# Altium PCB fader2_pcb.PcbDoc (part 3 of 3)
Units mil, origin at the board's own origin, x right, y up, seen from the top; angles counter-clockwise.
Board outline 5700 x 3900 mil, 6 copper layers (TOP, GND1, PWR1, PWR2, GND4, BOT), stack 48.468 mil thick; 196 components, 127 nets, 1359 pads, 531 vias.
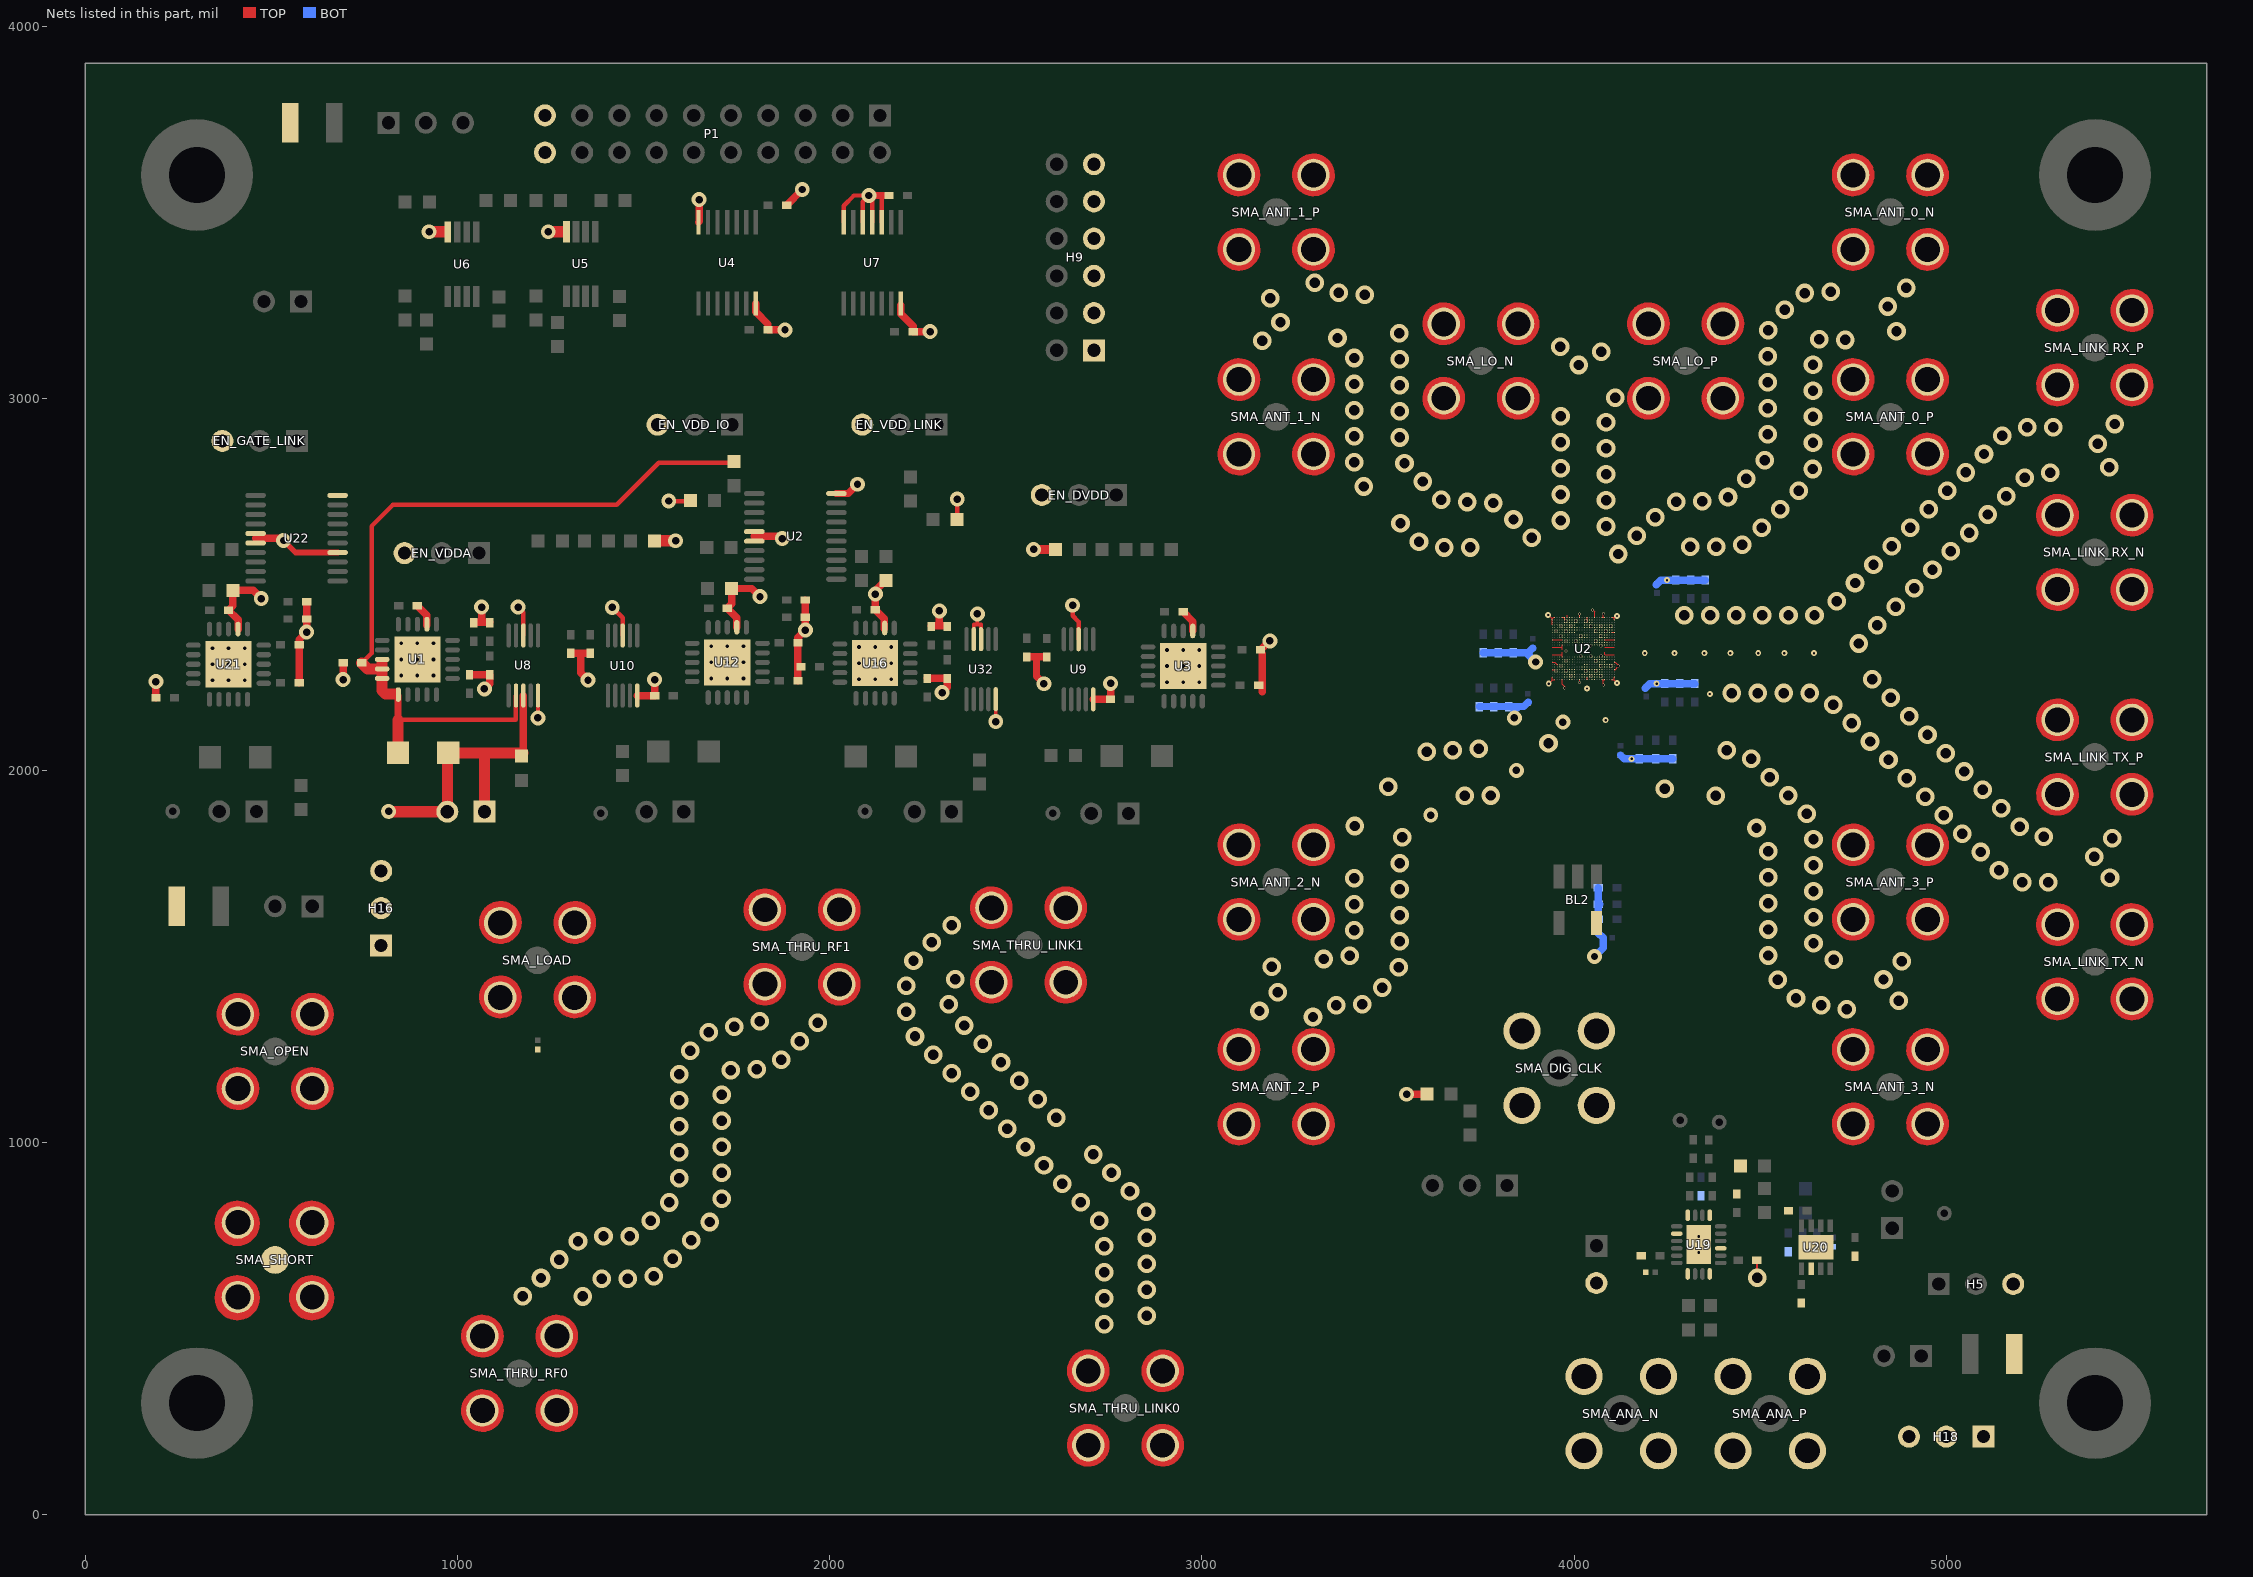
[diagram p7: the nets of this part, all layers, seen from the top]

## Via types
v1: diameter 50, hole 28, TOP to BOT, 259 vias
v2: diameter 40, hole 20, TOP to BOT, tented both sides, 128 vias
v3: diameter 8, hole 6, TOP to BOT, tented both sides, 63 vias
v4: diameter 20, hole 10, TOP to BOT, 45 vias
v5: diameter 16, hole 6, TOP to BOT, tented both sides, 17 vias
v6: diameter 8, hole 6, TOP to BOT, 7 vias
v7: diameter 40, hole 20, TOP to BOT, 4 vias
v8: diameter 20, hole 10, TOP to BOT, tented both sides, 4 vias
v9: diameter 19.68, hole 7.87, TOP to BOT, 2 vias
v10: diameter 12, hole 6, TOP to BOT, tented both sides, 2 vias

## Nets (pads, with @x,y where several pads share a name; then routed paths per layer and width w, separated by ;. In a path a pad name is that pad's centre, name@x,y a point inside that pad or via, vN(x,y) a via of type N, cw(c..) or ccw(c..) an arc to the next point about the centre after c; other vN are vias at no path point) (continued)
VDDA_REG: C2.1 R9.2 R38.1 U1.1 U1.18 U1.19 U1.20 U8.2 | length 2127.6
  TOP w12: C2.1@742.82,2288.83 769.13,2315.14 769.13,2656.35 826.61,2713.83 1427.82,2713.83 1540.82,2826.83 R9.2@1739.82,2826.83 ; 841.25,2136.18 1157.25,2136.18 U8.2@1157.25,2201.24
  TOP w20: 840.31,2135.24 U1.1@840.31,2201.26
  TOP w30: C2.1@742.82,2288.83 759,2272.65 U1.19@797,2272.65 ; 797,2287.24 U1.19@797,2272.65 ; 832.31,2205.24 806.28,2205.24 797,2214.52 U1.19@797,2272.65 ; R38.1@840.31,2047.24 840.31,2135.24
VDDA_RS: FB10.1 H_VDDA.1 H_VDDA.2 R38.2 TP_VDDA.1 U8.3 | length 829.6
  TOP w20: R38.2@972.82,2044.75 R38.2@975.31,2047.24 ; FB10.1@1176.94,2047.65 U8.3@1176.94,2201.24
  TOP w30: TP_VDDA.1@814.92,1889.92 815.69,1889.14 H_VDDA.2@972.82,1889.14 R38.2@972.82,2044.75 ; R38.2@975.53,2047.02 1072.82,2047.02 ; H_VDDA.1@1072.82,1889.14 1072.82,2047.02 ; FB10.1@1176.31,2047.02 1072.82,2047.02
VSS: BL2.4 C1.2 C2.2 C3.2 C4.2 C5.2 C6.2 C8.2 C10.2 C13.2 C14.2 C17.2 C18.2 C19.2 C20.2 C21.2 C22.2 C23.2 C25.2 C26.2 C29.2 C30.2 C31.2 C32.2 C33.2 C34.2 C35.2 C36.2 C37.2 C38.2 C39.2 C40.2 C43.2 C46.2 C47.2 C48.2 C49.2 C50.2 C51.2 C52.2 C53.2 C62.2 C63.2 C64.2 C65.2 C66.2 C67.2 C69.2 C70.2 C71.2 C75.2 C76.2 C77.2 C78.2 C86.2 C87.2 C88.2 C89.2 C90.2 C91.2 C92.2 C95.2 C96.2 C98.2 C99.2 C100.2 C102.2 C103.2 C104.2 C105.2 C113.2 C114.2 C115.2 C116.2 C117.2 C118.2 EN_DVDD.3 EN_GATE_LINK.3 EN_VDD_IO.3 EN_VDD_LINK.3 EN_VDDA.3 H5.3 H9.1 H9.3 H9.5 H9.7 H9.9 H9.11 H13.2 H16.1 H16.2 H16.3 H18.1 H18.2 H18.3 P1.19 P1.20 R1.1 R2.2 R5.1 R6.1 R23.2 R33.2 R40.1 R44.2 R51.2 R72.1 SMA_ANA_N.2 SMA_ANA_N.3 SMA_ANA_N.4 SMA_ANA_N.5 SMA_ANA_P.2 SMA_ANA_P.3 SMA_ANA_P.4 SMA_ANA_P.5 SMA_ANT_0_N.2 SMA_ANT_0_N.3 SMA_ANT_0_N.4 SMA_ANT_0_N.5 SMA_ANT_0_P.2 SMA_ANT_0_P.3 SMA_ANT_0_P.4 SMA_ANT_0_P.5 SMA_ANT_1_N.2 SMA_ANT_1_N.3 SMA_ANT_1_N.4 SMA_ANT_1_N.5 SMA_ANT_1_P.2 SMA_ANT_1_P.3 SMA_ANT_1_P.4 SMA_ANT_1_P.5 SMA_ANT_2_N.2 SMA_ANT_2_N.3 SMA_ANT_2_N.4 SMA_ANT_2_N.5 SMA_ANT_2_P.2 SMA_ANT_2_P.3 SMA_ANT_2_P.4 SMA_ANT_2_P.5 SMA_ANT_3_N.2 SMA_ANT_3_N.3 SMA_ANT_3_N.4 SMA_ANT_3_N.5 SMA_ANT_3_P.2 SMA_ANT_3_P.3 SMA_ANT_3_P.4 SMA_ANT_3_P.5 SMA_DIG_CLK.2 SMA_DIG_CLK.3 SMA_DIG_CLK.4 SMA_DIG_CLK.5 SMA_LINK_RX_N.2 SMA_LINK_RX_N.3 SMA_LINK_RX_N.4 SMA_LINK_RX_N.5 SMA_LINK_RX_P.2 SMA_LINK_RX_P.3 SMA_LINK_RX_P.4 SMA_LINK_RX_P.5 SMA_LINK_TX_N.2 SMA_LINK_TX_N.3 SMA_LINK_TX_N.4 SMA_LINK_TX_N.5 SMA_LINK_TX_P.2 SMA_LINK_TX_P.3 SMA_LINK_TX_P.4 SMA_LINK_TX_P.5 SMA_LO_N.2 SMA_LO_N.3 SMA_LO_N.4 SMA_LO_N.5 SMA_LO_P.2 SMA_LO_P.3 SMA_LO_P.4 SMA_LO_P.5 SMA_LOAD.2 SMA_LOAD.3 SMA_LOAD.4 SMA_LOAD.5 SMA_OPEN.2 SMA_OPEN.3 SMA_OPEN.4 SMA_OPEN.5 SMA_SHORT.1 SMA_SHORT.2 SMA_SHORT.3 SMA_SHORT.4 SMA_SHORT.5 SMA_THRU_LINK0.2 SMA_THRU_LINK0.3 SMA_THRU_LINK0.4 SMA_THRU_LINK0.5 SMA_THRU_LINK1.2 SMA_THRU_LINK1.3 SMA_THRU_LINK1.4 SMA_THRU_LINK1.5 SMA_THRU_RF0.2 SMA_THRU_RF0.3 SMA_THRU_RF0.4 SMA_THRU_RF0.5 SMA_THRU_RF1.2 SMA_THRU_RF1.3 SMA_THRU_RF1.4 SMA_THRU_RF1.5 U1.12 U1.21 U2.10 U2.15 U2.16 U2.A2 U2.A7 U2.A10 U2.A13 U2.A16 U2.A19 U2.A22 U2.A25 U2.AA1 U2.AA2 U2.AA3 U2.AA4 U2.AA5 U2.AA6 U2.AA7 U2.AA8 U2.AA9 U2.AA10 U2.AA11 U2.AA14 U2.AA15 U2.AA18 U2.AA19 U2.AA20 U2.AA21 U2.AA22 U2.AA23 U2.AA24 U2.AA25 U2.AB1 U2.AB4 U2.AB5 U2.AB6 U2.AB7 U2.AB8 U2.AB9 U2.AB10 U2.AB11 U2.AB12 U2.AB13 U2.AB14 U2.AB15 U2.AB16 U2.AB17 U2.AB18 U2.AB19 U2.AB20 U2.AB21 U2.AB22 U2.AB23 U2.AB26 U2.AC4 U2.AC5 U2.AC6 U2.AC7 U2.AC8 U2.AC9 U2.AC11 U2.AC12 U2.AC14 U2.AC15 U2.AC17 U2.AC18 U2.AC20 U2.AC21 U2.AC22 U2.AC23 U2.AD4 U2.AD5 U2.AD6 U2.AD7 U2.AD20 U2.AD21 U2.AD22 U2.AD23 U2.AE1 U2.AE4 U2.AE5 U2.AE6 U2.AE7 U2.AE20 U2.AE21 U2.AE22 U2.AE23 U2.AE26 U2.AF2 U2.AF3 U2.AF4 U2.AF5 U2.AF6 U2.AF7 U2.AF10 U2.AF13 U2.AF16 U2.AF19 U2.AF22 U2.AF25 U2.B1 U2.B4 U2.B5 U2.B6 U2.B7 U2.B20 U2.B21 U2.B26 U2.C4 U2.C5 U2.C6 U2.C7 U2.C20 U2.C21 U2.D4 U2.D5 U2.D6 U2.D7 U2.D8 U2.D9 U2.D11 U2.D12 U2.D14 U2.D15 U2.D17 U2.D18 U2.D20 U2.D21 U2.E1 U2.E4 U2.E5 U2.E6 U2.E7 U2.E8 U2.E9 U2.E10 U2.E11 U2.E12 U2.E13 U2.E14 U2.E15 U2.E16 U2.E17 U2.E18 U2.E19 U2.E20 U2.E21 U2.E26 U2.F1 U2.F4 U2.F5 U2.F6 U2.F7 U2.F8 U2.F9 U2.F10 U2.F11 U2.F12 U2.F13 U2.F16 U2.F17 U2.F18 U2.F19 U2.F20 U2.F21 U2.F22 U2.F23 U2.F24 U2.F25 U2.F26 U2.G4 U2.G5 U2.G6 U2.G7 U2.G8 U2.G9 U2.G10 U2.G11 U2.G12 U2.G13 U2.G16 U2.G17 U2.G18 U2.G19 U2.G20 U2.G21 U2.G22 U2.G23 U2.G24 U2.G25 U2.H4 U2.H5 U2.H6 U2.H7 U2.H10 U2.H11 U2.H12 U2.H13 U2.H16 U2.H17 U2.H18 U2.H19 U2.H22 U2.H23 U2.H24 U2.H25 U2.J1 U2.J4 U2.J5 U2.J6 U2.J7 U2.J10 U2.J11 U2.J12 U2.J13 U2.J16 U2.J17 U2.J18 U2.J19 U2.J22 U2.J23 U2.J24 U2.J25 U2.J26 U2.K2 U2.K3 U2.K4 U2.K5 U2.K12 U2.K13 U2.K16 U2.K17 U2.K22 U2.K23 U2.K24 U2.K25 U2.K26 U2.L2 U2.L3 U2.L4 U2.L5 U2.L12 U2.L13 U2.L16 U2.L17 U2.L22 U2.L23 U2.L24 U2.L25 U2.M1 U2.M2 U2.M3 U2.M4 U2.M5 U2.M8 U2.M9 U2.M12 U2.M13 U2.M16 U2.M17 U2.M20 U2.M21 U2.M22 U2.M23 U2.M24 U2.M25 U2.M26 U2.N2 U2.N3 U2.N4 U2.N5 U2.N8 U2.N9 U2.N12 U2.N13 U2.N16 U2.N17 U2.N20 U2.N21 U2.N22 U2.N23 U2.N24 U2.N25 U2.P8 U2.P9 U2.P10 U2.P11 U2.P16 U2.P17 U2.P21 U2.P22 U2.P24 U2.P25 U2.R1 U2.R8 U2.R9 U2.R10 U2.R11 U2.R16 U2.R17 U2.R26 U2.T2 U2.T3 U2.T5 U2.T6 U2.T10 U2.T11 U2.T16 U2.T17 U2.U2 U2.U3 U2.U4 U2.U5 U2.U6 U2.U7 U2.U10 U2.U11 U2.U16 U2.U17 U2.U22 U2.U23 U2.U24 U2.U25 U2.V1 U2.V2 U2.V3 U2.V4 U2.V5 U2.V6 U2.V7 U2.V10 U2.V11 U2.V14 U2.V15 U2.V18 U2.V19 U2.V22 U2.V23 U2.V24 U2.V25 U2.V26 U2.W1 U2.W2 U2.W3 U2.W4 U2.W5 U2.W6 U2.W7 U2.W10 U2.W11 U2.W14 U2.W15 U2.W18 U2.W19 U2.W22 U2.W23 U2.W24 U2.W25 U2.W26 U2.Y2 U2.Y3 U2.Y4 U2.Y5 U2.Y6 U2.Y7 U2.Y8 U2.Y9 U2.Y10 U2.Y11 U2.Y14 U2.Y15 U2.Y18 U2.Y19 U2.Y20 U2.Y21 U2.Y22 U2.Y23 U2.Y24 U2.Y25 U3.12 U3.21 U4.7 U4.14 U5.4 U6.4 U7.3 U7.4 U7.5 U7.7 U7.14 U8.5 U8.8 U9.5 U9.8 U10.5 U10.8 U12.12 U12.21 U16.12 U16.21 U19.3 U19.7 U19.10 U19.12 U19.17 U19.20 U19.21 U20.6 U20.9 U21.12 U21.21 U22.4 U22.10 U22.15 U22.16 U32.5 U32.8 U32.9 | length 30101
  TOP w3: 1265.1,325.06 1265.1,281.91 SMA_THRU_RF0.3@1266.91,280.1 ; 2849.94,385.1 SMA_THRU_LINK0.3@2893.09,385.1 ; 3298.19,1094.96 3298.19,1051.81 SMA_ANT_2_P.3@3300,1050 ; 3298.19,1644.96 3298.19,1601.81 SMA_ANT_2_N.3@3300,1600 ; 3298.19,2894.96 3298.19,2851.81 SMA_ANT_1_N.3@3300,2850 ; 3298.19,3444.96 3298.19,3401.81 SMA_ANT_1_P.3@3300,3400 ; 3848.19,3044.96 3848.19,3001.81 SMA_LO_N.3@3850,3000 ; v5(3930.68,2417.64) 3941.38,2406.91 ; v5(3932.12,2233.16) 3941.38,2242.42 ; U2.AF25@3941.38,2250.59 3941.38,2242.42 ; U2.AF22@3941.38,2270.67 U2.AE22@3948.07,2270.67 ; U2.AF19@3941.38,2290.75 3948.07,2290.75 U2.AD20@3954.77,2284.05 ; U2.AF16@3941.38,2310.83 U2.AB16@3968.15,2310.83 ; U2.AF13@3941.38,2330.9 U2.AB13@3968.15,2330.9 ; U2.AF10@3941.38,2350.98 U2.AB10@3968.15,2350.98 ; U2.AF4@3941.38,2391.14 U2.AF3@3941.38,2397.83 U2.AF2@3941.38,2404.53 3941.38,2406.91 ; U2.AE26@3948.07,2243.9 3942.85,2243.9 3941.38,2242.42 ; U2.AE1@3948.07,2411.22 3945.68,2411.22 3941.38,2406.91 ; U2.AB26@3968.15,2243.9 3968.15,2231.85 3975,2225 v6(3975,2221.22) ; U2.AB17@3968.15,2304.13 U2.AB16@3968.15,2310.83 ; U2.AB15@3968.15,2317.52 U2.AB16@3968.15,2310.83 ; U2.AB14@3968.15,2324.21 U2.AB13@3968.15,2330.9 ; U2.AB12@3968.15,2337.6 U2.AB13@3968.15,2330.9 ; U2.AB1@3968.15,2411.22 U2.AA1@3974.84,2411.22 U2.AA2@3974.84,2404.53 ; v3(4015,2235.91) U2.R26@4015,2243.89 ; U2.R1@4015,2411.22 v3(4015,2420.24) ; U2.M26@4035.08,2243.89 U2.M25@4035.08,2250.59 ; U2.M3@4035.08,2397.83 U2.M2@4035.08,2404.53 U2.M1@4035.08,2411.22 ; v6(4050,2431.22) 4055.16,2426.06 U2.J1@4055.16,2411.22 ; U2.F26@4075.24,2244.21 4078.59,2244.21 ; U2.F1@4075.24,2411.22 4078.59,2411.22 ; v3(4078.62,2229.53) 4078.59,2244.21 ; v3(4079,2421.25) 4079,2411.63 4078.59,2411.22 ; U2.E26@4081.93,2244.21 4078.59,2244.21 ; U2.E16@4081.93,2310.82 U2.E15@4081.93,2317.52 ; U2.E13@4081.93,2330.9 U2.A13@4108.7,2330.9 ; U2.E10@4081.93,2350.98 U2.A10@4108.7,2350.98 ; U2.E1@4081.93,2411.22 4078.59,2411.22 ; 4083.43,2310.82 U2.A16@4108.7,2310.82 ; U2.B26@4102.01,2243.89 4106.79,2243.89 4108.7,2241.98 ; U2.B7@4102.01,2371.06 U2.A7@4108.7,2371.06 ; U2.B1@4102.01,2411.22 4106.96,2411.22 ; U2.A25@4108.7,2250.59 4108.7,2241.98 ; U2.A22@4108.7,2270.67 4110.5,2270.67 4119.06,2279.23 v3(4119.06,2280) 4119.06,2282.18 4110.5,2290.74 U2.A19@4108.7,2290.74 ; U2.A2@4108.7,2404.53 4108.7,2409.47 4106.96,2411.22 ; v5(4115.68,2235) 4108.7,2241.98 ; v5(4115.68,2415) 4111.9,2411.22 4106.96,2411.22 ; 4398.19,3044.96 4398.19,3001.81 SMA_LO_P.3@4400,3000 ; 4948.19,1094.96 4948.19,1051.81 SMA_ANT_3_N.3@4950,1050 ; 4948.19,1644.96 4948.19,1601.81 SMA_ANT_3_P.3@4950,1600 ; 4948.19,2894.96 4948.19,2851.81 SMA_ANT_0_P.3@4950,2850 ; 4948.19,3444.96 4948.19,3401.81 SMA_ANT_0_N.3@4950,3400 ; 5497.41,1430.81 5497.41,1387.66 SMA_LINK_TX_N.3@5499.21,1385.85 ; 5497.41,1980.81 5497.41,1937.66 SMA_LINK_TX_P.3@5499.21,1935.85 ; 5497.41,2530.81 5497.41,2487.66 SMA_LINK_RX_N.3@5499.21,2485.85 ; 5497.41,3080.81 5497.41,3037.66 SMA_LINK_RX_P.3@5499.21,3035.85
  TOP w5.75: C75.2@4491.05,683.84 4492.05,684.84 v1(4492.05,637)
  TOP w10: v2(1216.31,2141.24) U8.5@1216.31,2201.24 ; U32.9@2387.25,2352.65 U32.9@2387.31,2352.71 2387.31,2392.24 2396.94,2392.24 ; v2(2396.94,2420.61) 2396.94,2392.24 ; 2406.57,2392.24 2396.94,2392.24 ; U32.8@2406.94,2352.65 2406.94,2391.87 ; v2(2446.31,2131.24) U32.5@2446.31,2191.24
  TOP w12: v2(1162.82,2438.83) 1176.99,2424.65 U8.8@1176.99,2362.71 ; v2(1415.82,2437.83) 1443.82,2409.83 U10.8@1443.82,2362.54 ; v2(1567.82,2723.83) 1624.82,2723.83 R6.1@1625.82,2724.83 ; U7.7@2037.64,3473.07 2037.64,3517.05 2065.26,3544.67 v2(2105.26,3544.67) ; U7.5@2088.82,3473.07 2088.82,3528.23 v2(2105.26,3544.67) ; U7.4@2114.41,3473.07 2114.41,3535.52 v2(2105.26,3544.67) ; U7.3@2140,3473.07 2140,3540.26 2144.41,3544.67 ; R40.1@2342.82,2673.83 v2(2342.82,2728.83) ; v2(2652.82,2443.83) 2652.82,2415.83 2668.82,2399.83 U9.8@2668.82,2352.54
  TOP w15: v2(532.82,2617.83) 565.2,2585.44 U22.4@678.05,2585.44
  TOP w20: C114.2@189.82,2195.83 v2(189.82,2238.83) ; U21.12@410.59,2379.8 410.59,2405.05 C96.2@384.82,2430.83 396.82,2442.83 R72.1@396.82,2483.83 450.82,2483.83 v2(472.82,2461.83) ; 457.58,2623.83 532.82,2623.83 v2(532.82,2617.83) ; C113.2@574.82,2235.83 C95.2@574.82,2337.83 574.82,2351.83 v2(594.82,2371.83) C64.2@594.82,2406.83 C63.2@594.82,2452.83 ; v2(692.82,2243.83) C2.2@692.82,2288.83 ; C62.2@892.31,2442.24 917.08,2417.46 U1.12@917.08,2390.24 ; C1.2@1032.31,2257.24 C40.2@1086.31,2257.24 1086.31,2233.24 v2(1072.31,2219.24) ; C46.2@1043.31,2398.24 1064.81,2398.24 ; v2(1064.81,2438.74) 1064.81,2398.24 ; C47.2@1086.31,2398.24 1064.81,2398.24 ; C26.2@1304.82,2314.83 1330.82,2314.83 ; v2(1350.82,2242.83) 1330.82,2262.83 1330.82,2314.83 ; C25.2@1356.82,2314.83 1330.82,2314.83 ; U10.5@1483.19,2201.12 1483.48,2200.83 C31.2@1529.82,2200.83 v2(1529.82,2243.83) ; U4.7@1647.64,3473.07 1649.41,3474.84 v2(1649.41,3533.82) ; U12.12@1750.59,2384.8 1750.59,2410.05 C43.2@1724.82,2435.83 1736.82,2447.83 R5.1@1736.82,2488.83 1790.82,2488.83 v2(1812.82,2466.83) ; 1797.58,2628.83 1872.82,2628.83 v2(1872.82,2622.83) ; U4.14@1801.18,3254.57 1801.18,3232.05 1834.41,3198.82 C14.2@1834.41,3183.82 v2(1879.98,3183.82) ; C13.2@1884.41,3518.82 v2(1926.41,3560.82) ; C29.2@1914.82,2240.83 C37.2@1914.82,2342.83 1914.82,2356.83 v2(1934.82,2376.83) C4.2@1934.82,2411.83 C3.2@1934.82,2457.83 ; U2.10@2018.05,2743.98 2049.98,2743.98 v2(2074.82,2768.83) ; v2(2105.26,3544.67) 2144.41,3544.67 ; C39.2@2122.31,2432.24 C39.2@2122.82,2431.72 ; v2@2132.82,2471.8 v2@2130.79,2473.83 ; U16.12@2147.08,2380.24 2147.08,2407.46 C39.2@2122.82,2431.72 ; R1.1@2150.82,2510.83 2122.31,2482.31 v2@2130.79,2473.83 ; U7.14@2191.18,3249.57 2191.18,3227.05 2224.41,3193.82 C66.2@2224.41,3178.82 v2(2269.98,3178.82) ; C32.2@2262.31,2247.24 C38.2@2316.31,2247.24 2316.31,2223.24 v2(2302.31,2209.24) ; C70.2@2273.31,2388.24 2294.81,2388.24 ; v2(2294.81,2428.74) 2294.81,2388.24 ; C71.2@2316.31,2388.24 2294.81,2388.24 ; C78.2@2529.82,2304.83 2555.82,2304.83 ; v2(2575.82,2232.83) 2555.82,2252.83 2555.82,2304.83 ; C69.2@2581.82,2304.83 2555.82,2304.83 ; U9.5@2708.19,2191.12 2708.48,2190.83 C104.2@2754.82,2190.83 v2(2754.82,2233.83) ; C102.2@2949.82,2425.83 2975.59,2400.05 U3.12@2975.59,2374.8 ; 3162.82,2211.83 C23.2@3162.82,2313.83 ; C23.2@3162.82,2327.83 v2(3182.82,2347.83) ; v2@3563,1130 R2.2@3605,1130 ; C39.2@2122.82,2431.72 v2(2122.82,2473.83) v2@2130.79,2473.83
  TOP w25: 1311.57,274.6 cw(c1266.91,280.1) 1265.1,325.06 cw(c1266.91,280.1) 1311.91,280.1 ; 1311.57,474.6 cw(c1266.91,480.1) 1264.93,435.14 cw(c1266.91,480.1) 1311.91,480.1 ; v2(2547.82,2593.83) R23.2@2606.82,2593.83 ; 2694.9,431.91 ccw(c2694.9,386.91) 2739.86,384.93 ccw(c2694.9,386.91) 2700.4,431.57 ; 2894.9,431.91 ccw(c2894.9,386.91) 2849.94,385.1 ccw(c2894.9,386.91) 2900.4,431.57 ; 3344.66,1044.5 cw(c3300,1050) 3298.19,1094.96 cw(c3300,1050) 3345,1050 ; 3344.66,1244.5 cw(c3300,1250) 3298.02,1205.04 cw(c3300,1250) 3345,1250 ; 3344.66,1594.5 cw(c3300,1600) 3298.19,1644.96 cw(c3300,1600) 3345,1600 ; 3344.66,1794.5 cw(c3300,1800) 3298.02,1755.04 cw(c3300,1800) 3345,1800 ; 3344.66,2844.5 cw(c3300,2850) 3298.19,2894.96 cw(c3300,2850) 3345,2850 ; 3344.66,3044.5 cw(c3300,3050) 3298.02,3005.04 cw(c3300,3050) 3345,3050 ; 3344.66,3394.5 cw(c3300,3400) 3298.19,3444.96 cw(c3300,3400) 3345,3400 ; 3344.66,3594.5 cw(c3300,3600) 3298.02,3555.04 cw(c3300,3600) 3345,3600 ; 3894.66,2994.5 cw(c3850,3000) 3848.19,3044.96 cw(c3850,3000) 3895,3000 ; 3894.66,3194.5 cw(c3850,3200) 3848.02,3155.04 cw(c3850,3200) 3895,3200 ; 4444.66,2994.5 cw(c4400,3000) 4398.19,3044.96 cw(c4400,3000) 4445,3000 ; 4444.66,3194.5 cw(c4400,3200) 4398.02,3155.04 cw(c4400,3200) 4445,3200 ; 4994.66,1044.5 cw(c4950,1050) 4948.19,1094.96 cw(c4950,1050) 4995,1050 ; 4994.66,1244.5 cw(c4950,1250) 4948.02,1205.04 cw(c4950,1250) 4995,1250 ; 4994.66,1594.5 cw(c4950,1600) 4948.19,1644.96 cw(c4950,1600) 4995,1600 ; 4994.66,1794.5 cw(c4950,1800) 4948.02,1755.04 cw(c4950,1800) 4995,1800 ; 4994.66,2844.5 cw(c4950,2850) 4948.19,2894.96 cw(c4950,2850) 4995,2850 ; 4994.66,3044.5 cw(c4950,3050) 4948.02,3005.04 cw(c4950,3050) 4995,3050 ; 4994.66,3394.5 cw(c4950,3400) 4948.19,3444.96 cw(c4950,3400) 4995,3400 ; 4994.66,3594.5 cw(c4950,3600) 4948.02,3555.04 cw(c4950,3600) 4995,3600 ; 5543.88,1380.35 cw(c5499.21,1385.85) 5497.41,1430.81 cw(c5499.21,1385.85) 5544.21,1385.85 ; 5543.88,1580.35 cw(c5499.21,1585.85) 5497.23,1540.89 cw(c5499.21,1585.85) 5544.21,1585.85 ; 5543.88,1930.35 cw(c5499.21,1935.85) 5497.41,1980.81 cw(c5499.21,1935.85) 5544.21,1935.85 ; 5543.88,2130.35 cw(c5499.21,2135.85) 5497.23,2090.89 cw(c5499.21,2135.85) 5544.21,2135.85 ; 5543.88,2480.35 cw(c5499.21,2485.85) 5497.41,2530.81 cw(c5499.21,2485.85) 5544.21,2485.85 ; 5543.88,2680.35 cw(c5499.21,2685.85) 5497.23,2640.89 cw(c5499.21,2685.85) 5544.21,2685.85 ; 5543.88,3030.35 cw(c5499.21,3035.85) 5497.41,3080.81 cw(c5499.21,3035.85) 5544.21,3035.85 ; 5543.88,3230.35 cw(c5499.21,3235.85) 5497.23,3190.89 cw(c5499.21,3235.85) 5544.21,3235.85 ; 455.31,1145.14 ccw(c410.31,1145.14) 455.31,1145.14 ; 455.31,1345.14 ccw(c410.31,1345.14) 455.31,1345.14 ; 456.73,583.14 ccw(c408.31,583.14) 456.73,583.14 ; 456.73,783.14 ccw(c408.31,783.14) 456.73,783.14 ; 655.31,1145.14 ccw(c610.31,1145.14) 655.31,1145.14 ; 655.31,1345.14 ccw(c610.31,1345.14) 655.31,1345.14 ; 656.73,583.14 ccw(c608.31,583.14) 656.73,583.14 ; 656.73,783.14 ccw(c608.31,783.14) 656.73,783.14 ; 1111.57,274.6 cw(c1066.91,280.1) 1111.91,280.1 cw(c1066.91,280.1) 1111.57,274.6 ; 1111.91,480.1 ccw(c1066.91,480.1) 1111.91,480.1 ; 1160.31,1391.45 ccw(c1115.31,1391.45) 1160.31,1391.45 ; 1160.31,1591.45 ccw(c1115.31,1591.45) 1160.31,1591.45 ; 1360.31,1391.45 ccw(c1315.31,1391.45) 1360.31,1391.45 ; 1360.31,1591.45 ccw(c1315.31,1591.45) 1360.31,1591.45 ; 1829.92,1380.78 cw(c1825.91,1425.6) 1829.92,1470.42 cw(c1825.91,1425.6) 1870.91,1425.6 cw(c1825.91,1425.6) 1870.57,1420.1 cw(c1825.91,1425.6) 1829.92,1380.78 ; 1829.92,1580.78 ccw(c1825.91,1625.6) 1870.91,1625.6 ccw(c1825.91,1625.6) 1829.92,1670.42 ccw(c1825.91,1625.6) 1829.92,1580.78 ; 1981.25,1420.1 ccw(c2025.91,1425.6) 2070.91,1425.6 ccw(c2025.91,1425.6) 1981.25,1420.1 ; 2070.91,1625.6 ccw(c2025.91,1625.6) 2070.91,1625.6 ; 2389.58,1434.92 cw(c2434.4,1430.91) 2434.4,1475.91 cw(c2434.4,1430.91) 2479.22,1434.92 cw(c2434.4,1430.91) 2389.58,1434.92 ; 2479.4,1630.91 ccw(c2434.4,1630.91) 2479.4,1630.91 ; 2589.58,1434.92 cw(c2634.4,1430.91) 2634.4,1475.91 cw(c2634.4,1430.91) 2639.9,1475.57 cw(c2634.4,1430.91) 2679.22,1434.92 cw(c2634.4,1430.91) 2589.58,1434.92 ; 2634.4,1675.91 ccw(c2634.4,1630.91) 2639.9,1586.25 ccw(c2634.4,1630.91) 2634.4,1675.91 ; 2739.9,186.91 ccw(c2694.9,186.91) 2739.9,186.91 ; 2894.9,231.91 cw(c2894.9,186.91) 2900.4,231.57 cw(c2894.9,186.91) 2894.9,231.91 ; 3144.66,1044.5 ccw(c3100,1050) 3145,1050 ccw(c3100,1050) 3144.66,1044.5 ; 3144.66,1594.5 ccw(c3100,1600) 3145,1600 ccw(c3100,1600) 3144.66,1594.5 ; 3144.66,2844.5 ccw(c3100,2850) 3145,2850 ccw(c3100,2850) 3144.66,2844.5 ; 3144.66,3394.5 ccw(c3100,3400) 3145,3400 ccw(c3100,3400) 3144.66,3394.5 ; 3145,1250 ccw(c3100,1250) 3145,1250 ; 3145,1800 ccw(c3100,1800) 3145,1800 ; 3145,3050 ccw(c3100,3050) 3145,3050 ; 3145,3600 ccw(c3100,3600) 3145,3600 ; 3694.66,2994.5 ccw(c3650,3000) 3695,3000 ccw(c3650,3000) 3694.66,2994.5 ; 3695,3200 ccw(c3650,3200) 3695,3200 ; 4244.66,2994.5 ccw(c4200,3000) 4245,3000 ccw(c4200,3000) 4244.66,2994.5 ; 4245,3200 ccw(c4200,3200) 4245,3200 ; 4794.66,1044.5 ccw(c4750,1050) 4795,1050 ccw(c4750,1050) 4794.66,1044.5 ; 4794.66,1594.5 ccw(c4750,1600) 4795,1600 ccw(c4750,1600) 4794.66,1594.5 ; 4794.66,2844.5 ccw(c4750,2850) 4795,2850 ccw(c4750,2850) 4794.66,2844.5 ; 4794.66,3394.5 ccw(c4750,3400) 4795,3400 ccw(c4750,3400) 4794.66,3394.5 ; 4795,1250 ccw(c4750,1250) 4795,1250 ; 4795,1800 ccw(c4750,1800) 4795,1800 ; 4795,3050 ccw(c4750,3050) 4795,3050 ; 4795,3600 ccw(c4750,3600) 4795,3600 ; 5343.88,1380.35 ccw(c5299.21,1385.85) 5344.21,1385.85 ccw(c5299.21,1385.85) 5343.88,1380.35 ; 5343.88,1930.35 ccw(c5299.21,1935.85) 5344.21,1935.85 ccw(c5299.21,1935.85) 5343.88,1930.35 ; 5343.88,2480.35 ccw(c5299.21,2485.85) 5344.21,2485.85 ccw(c5299.21,2485.85) 5343.88,2480.35 ; 5343.88,3030.35 ccw(c5299.21,3035.85) 5344.21,3035.85 ccw(c5299.21,3035.85) 5343.88,3030.35 ; 5344.21,1585.85 ccw(c5299.21,1585.85) 5344.21,1585.85 ; 5344.21,2135.85 ccw(c5299.21,2135.85) 5344.21,2135.85 ; 5344.21,2685.85 ccw(c5299.21,2685.85) 5344.21,2685.85 ; 5344.21,3235.85 ccw(c5299.21,3235.85) 5344.21,3235.85
  TOP w30: v2(923.94,3447.35) U6.4@965.33,3447.35 ; v2(1243.94,3447.35) U5.4@1285.33,3447.35 ; R33.2@1529.95,2616.97 v2(1585.95,2616.97)
  BOT w20: C19.2@3744.84,2171.78 3864.9,2171.78 C22.2@3876.84,2183.72 ; C48.2@3756.57,2316.53 3876.63,2316.53 C51.2@3888.57,2328.47 ; v2(3839.84,2141.22) 3839.84,2161.22 3849.84,2171.22 ; 3876.63,2311.33 v2(3896.65,2291.3) ; v2(4055,1500) 4078,1523 C100.2@4078,1550 4065.5,1562.5 C98.2@4065.5,1600 C30.2@4065.5,1640 C99.2@4065.5,1685 ; C30.2@4068,1640 C30.2@4068.63,1640.63 ; C118.2@4124.84,2041.22 4134.84,2031.22 v5(4154.84,2031.22) C117.2@4174.84,2031.22 ; C117.2@4174.93,2031.14 C117.2@4174.84,2031.22 ; C103.2@4191.9,2221.22 4203.84,2233.16 v5(4222.12,2233.16) C34.2@4323.9,2233.16 ; C6.2@4221.18,2499.28 4233.12,2511.22 v5(4249.84,2511.22) C52.2@4353.18,2511.22 ; C115.2@4265.26,2031.14 4265.18,2031.22 C116.2@4219.84,2031.22 C117.2@4174.84,2031.22
  other v1: 2738.15,511.63 2852.34,534.41 2738.15,581.63 1174.99,586.8 1336.33,586.65 2852.34,604.41 1387.21,634.72 1457.21,634.72 1224.49,636.3 1526.95,640.83 2738.15,651.63 2852.34,674.41 1273.98,685.8 1578.85,687.79 2738.15,721.63 1323.82,734.96 1628.35,737.29 2852.34,744.41 1392.41,748.92 1462.41,748.92 1677.85,786.79 1519.29,789.73 2724.31,790.25 2850.46,814.38 1568.78,839.22 2674.81,839.75 1710.12,848.91 2806.89,869.17 2625.31,889.24 1595.92,903.75 1710.12,918.91 2757.39,918.67 2575.82,938.74 2707.89,968.16 1595.92,973.75 2526.32,988.24 1710.12,988.91 2476.82,1037.74 1595.92,1043.75 1710.12,1058.91 2608.9,1067.16 2427.32,1087.23 1595.92,1113.75 2559.4,1116.66 1710.12,1128.91 2377.83,1136.73 2509.9,1166.15 1595.92,1183.75 2328.33,1186.23 1734.44,1194.54 1804.38,1197.45 2460.41,1215.65 1869.71,1222.6 2278.83,1235.73 1625.56,1247.16 2410.91,1265.15 1919.21,1272.09 2229.34,1285.22 1675.29,1296.43 1743.62,1311.64 2361.41,1314.65 1968.38,1321.91 1812.04,1326.42 3298.65,1337.42 2206.25,1351.31 3155.01,1353.61 4733.08,1358.6 3361.14,1368.96 4663.85,1368.96 2320.44,1371.4 3431.07,1372.08 4871.98,1381.2 4596.48,1387.98 3203.66,1403.94 3485.07,1416.63 2206.25,1421.31 4546.99,1437.48 4831.46,1438.29 2337.48,1439.3 3529.08,1471.06 3187.65,1472.08 4880.96,1487.78 2225.34,1488.65 4697.48,1491.04 3327.9,1493.32 3397.41,1501.63 4521.39,1502.63 4643.47,1535.58 2274.84,1538.15 3531.52,1541.02 3409.43,1570.59 4521.39,1572.63 2327.77,1583.96 4643.47,1605.58 3531.52,1611.02 3409.43,1640.59 4521.39,1642.63 4643.47,1675.58 3531.52,1681.02 5204.38,1699.8 5274.38,1699.8 3409.43,1710.59 5439.97,1711.78 4521.39,1712.63 5141.86,1731.29 4643.47,1745.58 3531.52,1751.02 5397.9,1767.72 5092.37,1780.79 4521.39,1782.63 4643.47,1815.58 5446.36,1818.24 3537.99,1820.72 5261.97,1821.89 5042.87,1830.29 4490.28,1845.34 5197.25,1848.56 3410.49,1850.58 4993.37,1879.78 4625.15,1883.14 5147.75,1898.06 4943.87,1929.28 3705.96,1931.68 4381.27,1931.68 3775.95,1932.7 4575.65,1932.63 5098.26,1947.55 4243.82,1950.43 3501.25,1956.62 4894.38,1978.78 4526.15,1982.13 5048.76,1997.05 4844.88,2028.28 4476.65,2031.63 4999.26,2046.55 3604.75,2050.66 3674.68,2053.77 4410.25,2053.77 3744.52,2058.52 3931.54,2072.89 4795.38,2077.77 4949.76,2096.05 4745.88,2127.27 4900.27,2145.54 4696.39,2176.77 4850.77,2195.04 4423.69,2207.9 4493.69,2207.9 4563.69,2207.9 4633.69,2207.9 4801.27,2244.54 4765.17,2341.06 4814.67,2390.56 4296.21,2417.02 4366.21,2417.02 4436.21,2417.02 4506.21,2417.02 4576.21,2417.02 4646.21,2417.02 4864.17,2440.05 4705.57,2454.11 4913.67,2489.55 4755.07,2503.61 4963.16,2539.05 4804.57,2553.11 4119.35,2581.48 5012.66,2588.54 3651.71,2599.06 3721.71,2599.06 4312.08,2601.23 4382.08,2601.23 4854.07,2602.61 4451.92,2605.96 3583.44,2614.56 3886.94,2624.71 4168.85,2630.97 5062.16,2638.04 4504.3,2652.39 4903.56,2652.1 4086.04,2655.51 3533.76,2663.87 3963.96,2671.44 3837.45,2674.21 4218.35,2680.47 5111.66,2687.54 4553.8,2701.89 4953.06,2701.6 3783.19,2718.44 3713.24,2721.15 4274.66,2722.05 4344.65,2723.32 4086.04,2725.51 3643.47,2726.81 4413.75,2734.5 5161.15,2737.04 3963.96,2741.44 4603.3,2751.39 5002.56,2751.1 3434.76,2762.86 3593.98,2776.3 4463.25,2784 5210.65,2786.53 4086.04,2795.51 5279.38,2799.8 5052.06,2800.6 4641.62,2809.96 3963.96,2811.44 5437.71,2814.15 3544.48,2825.8 3409.6,2828.18 4512.74,2833.49 5101.55,2850.09 4086.04,2865.51 5407.44,2877.27 4642.1,2879.96 3963.96,2881.44 3531.69,2894.62 3409.6,2898.18 5151.05,2899.59 4520.01,2903.12 5217.4,2921.89 5287.4,2921.89 5452.66,2930.7 4086.04,2935.51 4642.1,2949.96 3963.96,2951.44 3531.69,2964.62 3409.6,2968.18 4520.01,2973.12 4110.71,3001.02 4642.1,3019.96 3531.69,3034.62 3409.6,3038.18 4520.01,3043.12 4012.48,3089.32 4642.1,3089.96 3531.69,3104.62 3409.6,3108.18 4520.01,3113.12 4072.89,3124.69 3962.98,3138.82 3161.97,3154.91 4728.7,3156.61 4658.71,3157.96 3364.59,3161.79 3530.87,3174.62 4866.39,3180.41 4522.09,3183.08 3211.46,3204.4 4565.83,3237.74 4843.3,3246.49 3183.95,3268.77 3437.93,3278.23 4619.55,3282.62 3368.16,3283.88 4689.46,3286.04 4892.47,3296.31 3303.51,3310.72
  other v2: 3550,1130 3615,1880 3845,2000 3970,2130
  other v3: 3991.65,2253.99 4045.29,2253.86 4072.08,2253.78 3951.29,2267.39 4031.6,2267.25 4058.54,2267.26 3978.36,2267.53 3964.78,2280.67 4071.79,2280.81 4098.82,2280.71 3978.24,2294.27 4058.45,2294.14 4018.19,2307.47 4045.09,2307.52 4072.02,2308.09 3978.34,2321.01 4044.93,2334.38 4071.94,2334.12 3978.53,2347.59 4004.9,2347.55 4058.65,2347.6 3964.5,2361.04 4018.18,2361.13 4071.8,2360.9 3978.31,2374.18 4085.36,2374.21 3951.51,2374.54 4058.36,2374.44 3964.99,2388.27 3991.64,2387.87 4044.9,2387.64 4072.15,2387.74 4098.81,2387.79 4004.89,2401.27 4031.65,2401.25 3977.98,2401.53
  other v4: 2906.69,2237.01 2950,2237.01 2993.31,2237.01 341.69,2242.01 385,2242.01 428.31,2242.01 2079,2244.93 2122.31,2244.93 2165.61,2244.93 1681.69,2247.01 1725,2247.01 1768.31,2247.01 849,2254.93 892.31,2254.93 935.61,2254.93 2906.69,2280.31 2950,2280.31 2993.31,2280.31 341.69,2285.31 385,2285.31 428.31,2285.31 2079,2288.24 2122.31,2288.24 2165.61,2288.24 1681.69,2290.31 1725,2290.31 1768.31,2290.31 849,2298.24 892.31,2298.24 935.61,2298.24 2906.69,2323.62 2950,2323.62 2993.31,2323.62 341.69,2328.62 385,2328.62 428.31,2328.62 2079,2331.54 2122.31,2331.54 2165.61,2331.54 1681.69,2333.62 1725,2333.62 1768.31,2333.62 849,2341.54 892.31,2341.54 935.61,2341.54
  other v5: 4085,2135 4365,2205 4035,2220 4190,2315 4270,2315 4350,2315 4420,2315 4495,2315 4565,2315 4645,2315
  other v9: 4335.05,704.19 4335.05,747.5
Y1: U2.Y1 | length 5.9
  TOP w3: U2.Y1@3981.54,2411.22 3981.54,2417.11
pads on no net: H9.10 H19.3 P1.3 P1.5 P1.7 P1.9 P1.11 P1.13 P1.14 SMA_OPEN.1 U1.2 U1.3 U1.4 U1.9 U1.13 U1.14 U1.17 U3.2 U3.3 U3.4 U3.9 U3.13 U3.14 U3.17 U4.6 U4.9 U7.6 U7.8 U7.9 U7.10 U7.11 U8.1 U8.4 U9.1 U9.4 U10.1 U10.4 U12.2 U12.3 U12.4 U12.9 U12.13 U12.14 U12.17 U16.2 U16.3 U16.4 U16.9 U16.13 U16.14 U16.17 U19.4 U19.13 U19.14 U20.7 U21.2 U21.3 U21.4 U21.9 U21.13 U21.14 U21.17 U22.1 U22.2 U22.3 U22.6 U22.7 U22.8 U22.11 U22.12 U22.13 U32.1 U32.4
copper on no net: | length 41.3
  TOP w20: 932.82,2084.14 932.82,2097.18 952.82,2117.18

## Polygon pours and split planes (outlines as drawn)
VSS on BOT "BOT-GND" (solid, remove dead copper, pour order 20): 0,0 5700,0 5700,3900 0,3900
VSS on TOP "TOP-GND" (solid, remove dead copper, pour order 24): 0,0 5700,0 5700,3900 0,3900
VSS on GND1 (split plane): 5679.9,3879.9 5679.9,20.1 20.1,20.1 20.1,3879.9
VDD_IO on PWR1 (split plane): 3470,2435 3470.12,2434.41 3470.45,2433.92 3470.94,2433.59 3471.53,2433.47 4111.2,2433.47 4111.2,2391.68 3911.57,2391.68 3910.98,2391.57 3910.49,2391.24 3910.15,2390.74 3910.04,2390.16 3910.04,2273.8 3910.15,2273.21 3910.49,2272.72 3910.98,2272.39 3911.57,2272.27 4114.15,2272.27 4114.15,2232.81 3471.53,2232.81 3470.94,2232.69 3470.45,2232.36 3470.12,2231.87 3470,2231.28 3470,1936.53 1396.53,1936.53 1396.53,2023.47 3235,2023.47 3235.59,2023.59 3236.08,2023.92 3236.41,2024.41 3236.53,2025 3236.53,2850 3236.41,2850.59 3236.08,2851.08 3235.59,2851.41 3235,2851.53 1663.06,2851.53 1663.06,3218.47 1840,3218.47 1840,3030 1840.12,3029.41 1840.45,3028.92 1840.94,3028.59 1841.53,3028.47 2206.53,3028.47 2207.11,3028.59 2207.61,3028.92 2207.94,3029.41 2208.06,3030 2208.06,3603.47 3470,3603.47
VDD_SCAN_FPGA on PWR1 (split plane): 2157.88,3100.27 2015.94,3100.27 2015.94,3398.74 2015.82,3399.32 2015.49,3399.82 2014.99,3400.15 2014.41,3400.27 741.53,3400.27 741.53,3788.47 2157.88,3788.47
VDDA on PWR1 (split plane): 4318.47,1801.53 1111.53,1801.53 1111.53,1888.47 4184.84,1888.47 4185.43,1888.59 4185.93,1888.92 4186.26,1889.41 4186.37,1890 4186.37,2296.43 4186.26,2297.02 4185.93,2297.52 4185.43,2297.85 4184.84,2297.96 4184.64,2297.92 4184.44,2297.96 3979.82,2297.96 3979.82,2360.11 4184.47,2360.11 4185.05,2360.22 4185.55,2360.55 4185.88,2361.05 4186,2361.64 4186,2453.47 4318.47,2453.47
VDD_IN on PWR1 (split plane): 3158.47,2086.53 855,2086.53 854.41,2086.41 853.92,2086.08 853.59,2085.59 853.47,2085 853.47,1016.24 853.59,1015.65 853.92,1015.16 854.41,1014.83 855,1014.71 5113.47,1014.71 5113.47,356.53 2851.09,356.53 2837.11,365.87 2820.89,372.59 2803.68,376.02 2786.12,376.02 2768.91,372.59 2752.69,365.87 2738.7,356.53 1253.07,356.53 1256.02,371.32 1256.02,380.1 1256.02,388.88 1252.59,406.09 1245.87,422.31 1236.12,436.9 1223.71,449.31 1209.12,459.07 1192.9,465.78 1175.69,469.21 1158.13,469.21 1140.92,465.78 1124.7,459.07 1110.11,449.31 1097.7,436.9 1087.94,422.31 1081.23,406.09 1077.8,388.88 1077.8,380.1 1077.8,371.32 1080.75,356.53 416.53,356.53 416.53,2473.47 3158.47,2473.47
no net on PWR1 (split plane): 5679.9,3879.9 5679.9,20.1 20.1,20.1 20.1,3879.9
VDD_LINK on PWR2 (split plane): 4212.72,1911.53 2436.53,1911.53 2436.53,1983.47 4119.06,1983.47 4119.65,1983.59 4120.14,1983.92 4120.47,1984.41 4120.59,1985 4120.59,2290.38 4120.47,2290.96 4120.14,2291.46 4119.65,2291.79 4119.06,2291.91 4087.79,2291.91 4087.79,2307.96 4212.72,2307.96
DVDD on PWR2 (split plane): 4069.57,2276.47 4069.69,2275.89 4070.02,2275.39 4070.52,2275.06 4071.1,2274.94 4097.58,2274.94 4097.58,2259.53 4071.79,2259.53 4071.2,2259.41 4070.71,2259.08 4070.37,2258.59 4070.26,2258 4070.26,2016.53 2495.94,2016.53 2495.94,2103.47 3829.25,2103.47 3829.84,2103.59 3830.34,2103.92 3830.67,2104.41 3830.78,2105 3830.78,2416.11 4069.57,2416.11
GATE_LINK on PWR2 (split plane): 4447.88,1796.53 526.53,1796.53 526.53,1873.47 4304.25,1873.47 4304.84,1873.59 4305.34,1873.92 4305.67,1874.41 4305.78,1875 4305.78,2134.69 4447.88,2134.69
VDD_FPGA_3P3V on PWR2 (split plane): 3133.47,3559.49 3130.79,3556.8 3121.03,3542.21 3114.32,3525.99 3110.89,3508.78 3110.89,3500 3110.89,3491.22 3114.32,3474.01 3121.03,3457.79 3130.79,3443.2 3133.47,3440.51 3133.47,3009.49 3130.79,3006.8 3121.03,2992.21 3114.32,2975.99 3110.89,2958.78 3110.89,2950 3110.89,2941.22 3114.32,2924.01 3121.03,2907.79 3130.79,2893.2 3133.47,2890.51 3133.47,2236.53 426.53,2236.53 426.53,3838.47 3133.47,3838.47
no net on PWR2 (split plane): 5679.9,3879.9 5679.9,20.1 20.1,20.1 20.1,3879.9
VSS on GND4 (split plane): 5679.9,3879.9 5679.9,20.1 20.1,20.1 20.1,3879.9

## Other copper
TOP:
  rectangle net NetU2_R24: 4007.07,2249.12 4016.24,2258.57
  rectangle net NetU2_R21: 4007,2269.29 4016.17,2278.74
  rectangle net NetU2_A11: 4094.07,2336.12 4109.98,2345.57
  rectangle net NetU2_A8: 4094.05,2356.25 4109.96,2365.7
  rectangle net NetU2_AD17: 3940.14,2296.12 3956.05,2305.56
  rectangle net NetU2_AD14: 3940.07,2316.09 3955.98,2325.54
  rectangle net NetU2_AD11: 3940.14,2336.16 3956.05,2345.61
  rectangle net NetU2_AD8: 3940.15,2356.31 3956.06,2365.76
  rectangle net NetU2_P5: 4013.6,2376.29 4022.96,2385.74
  rectangle net NetU2_P2: 4013.68,2396.44 4023.03,2405.89
  rectangle net VSS: 3986.82,2403.02 3996.22,2412.46
  rectangle net VSS: 4047.09,2242.61 4056.49,2252.06
  rectangle net VSS: 3986.84,2242.59 3996.24,2252.04
  rectangle net VSS: 3960.21,2316.13 3996.2,2325.58
  rectangle net DVDD: 3973.4,2329.66 3996.23,2339.11
  rectangle net DVDD: 3973.4,2302.81 3996.23,2312.25
  rectangle net VSS: 3960.21,2296.16 3969.47,2305.56
  rectangle net VSS: 3966.96,2281.65 3982.78,2291.05
  rectangle net VSS: 3966.93,2289.27 3996.17,2298.72
  rectangle net VSS: 3946.43,2271.07 3982.79,2285.45
  rectangle net DVDD: 3986.96,2276.02 4002.91,2285.47
  rectangle net VSS: 4020.46,2269.2 4036.45,2278.64
  rectangle net VSS: 4027.17,2275.85 4036.4,2285.3
  rectangle net VSS: 3946.43,2262.72 4002.91,2272.17
  rectangle net VDD_IO: 3946.62,2249.12 3969.45,2258.57
  rectangle net VSS: 3973.61,2249.29 4002.91,2262.99
  rectangle net DVDD: 4040.38,2284.53 4049.78,2293.98
  rectangle net DVDD: 4000.37,2289.42 4049.78,2298.87
  rectangle net DVDD: 4040.4,2275.89 4063.23,2285.34
  rectangle net VDD_IO: 4080.48,2249.15 4103.32,2258.6
  rectangle net DVDD: 4080.47,2262.66 4103.3,2272.11
  rectangle net VSS: 4067.24,2271.24 4076.58,2281.35
  rectangle net VSS: 4020.31,2249.3 4076.58,2258.55
  rectangle net VSS: 4027.19,2257.91 4076.58,2271.95
  rectangle net VSS: 4080.73,2296.01 4089.91,2305.46
  rectangle net VSS: 4080.67,2316.07 4089.85,2325.52
  rectangle net VSS: 4083.22,2276.11 4103.42,2285.36
  rectangle net VSS: 4067.23,2276.11 4083.25,2290.1
  rectangle net VSS: 4053.89,2289.38 4083.23,2303.38
  rectangle net VDD_LINK: 4094.06,2295.93 4103.23,2305.38
  rectangle net VSS: 4000.35,2302.88 4083.24,2312.32
  rectangle net VDDA: 4000.34,2325.49 4022.94,2338.96
  rectangle net VDDA: 4000.34,2316.1 4049.8,2325.55
  rectangle net DVDD: 4053.75,2316.05 4076.59,2325.49
  rectangle net GATE_LINK: 4094.1,2316.27 4103.27,2325.72
  rectangle net VDDA: 4026.96,2342.79 4049.79,2352.24
  rectangle net DVDD: 3986.75,2356.38 4009.59,2365.82
  rectangle net VDD_IO: 3946.66,2396.39 3969.5,2405.84
  rectangle net VSS: 3960.2,2336.15 3969.46,2345.6
  rectangle net VSS: 3966.87,2348.89 3983.07,2362.66
  rectangle net VSS: 3960.21,2356.21 3983.04,2369.98
  rectangle net VSS: 4013.53,2349.34 4022.97,2358.83
  rectangle net VSS: 3966.86,2342.82 4022.97,2352.27
  rectangle net VSS: 4013.53,2356.39 4036.37,2365.84
  rectangle net VSS: 4002.05,2376.41 4009.57,2385.86
  rectangle net VSS: 3973.57,2388.72 4002.89,2398.13
  rectangle net VSS: 3940.15,2369.76 4002.88,2392.48
  rectangle net VSS: 3973.57,2396.39 4009.57,2405.84
  rectangle net DVDD: 4040.32,2365.35 4049.88,2374.8
  rectangle net DVDD: 4027.05,2369.57 4049.88,2379.02
  rectangle net DVDD: 4040.32,2356.14 4063.16,2365.59
  rectangle net VSS: 4027.12,2392.5 4049.95,2405.85
  rectangle net VSS: 4027.14,2329.62 4054.06,2338.82
  rectangle net VSS: 4053.92,2329.5 4067.21,2352.25
  rectangle net VSS: 4083.17,2336.35 4089.89,2345.54
  rectangle net VSS: 4067,2329.52 4083.2,2356.39
  rectangle net VSS: 4067,2356.32 4089.84,2369.74
  rectangle net DVDD: 4053.68,2396.5 4076.51,2405.95
  rectangle net VDD_IO: 4080.69,2396.44 4103.53,2405.89
  rectangle net VSS: 4027.07,2383.05 4103.33,2392.49
  rectangle net VSS: 4053.91,2369.72 4103.39,2383.36
  pour cut-out: 4378,998 4304,998 4304,968 4378,968
  region net VSS: 420.81,684.92 cw(c509.92,684.92) 509.92,774.02 cw(c509.92,684.92) 599.02,684.92 cw(c509.92,684.92) 509.92,595.81 cw(c509.92,684.92)
PWR1 (plane layer: these items are gaps in the copper):
  lines w3: 4115.68,2273.64 4115.68,2231.28 3471.53,2231.28 3471.53,1935 1395,1935 1395,2025 3235,2025 3235,2850 1661.53,2850 1661.53,3220 1841.53,3220 1841.53,3030 2206.53,3030 2206.53,3605 3471.53,3605 3471.53,2435 4112.73,2435 4112.73,2390.16 3911.57,2390.16 3911.57,2273.8 4115.68,2273.8 ; 4184.44,2296.43 3978.29,2296.43 3978.29,2361.64 4184.47,2361.64 4184.47,2455 4320,2455 4320,1800 1110,1800 1110,1890 4184.84,1890 4184.84,2296.43 ; 415,355 5115,355 5115,1016.24 855,1016.24 855,2085 3160,2085 3160,2475 415,2475 415,355 ; 740,3398.74 740,3790 2159.41,3790 2159.41,3098.74 2014.41,3098.74 2014.41,3398.74 740,3398.74
PWR2 (plane layer: these items are gaps in the copper):
  lines w3: 2494.41,2015 2494.41,2105 3829.25,2105 3829.25,2417.64 4071.1,2417.64 4071.1,2276.47 4099.11,2276.47 4099.11,2258 4071.79,2258 4071.79,2015 2495,2015 ; 425,2235 3135,2235 3135,3840 425,3840 425,2235 ; 525,1795 4449.41,1795 4449.41,2136.22 4304.25,2136.22 4304.25,1875 525,1875 525,1795 ; 2435,1910 2435,1985 4119.06,1985 4119.06,2290.38 4086.26,2290.38 4086.26,2309.49 4214.25,2309.49 4214.25,1910 2435,1910

## Silkscreen, mask and mechanical layers (free items; w line width, h text height)
Top Overlay:
  text "FADER2" at 555,245 h31.5
  text "08/14/2018" at 550,165 h31.5
Drill Drawing:
  circle w10: c6090.3,2034.32 r47.64
  lines w10: 6042.66,1772.28 6137.95,1772.28 6137.95,1867.57 6042.66,1867.57 6042.66,1772.28 ; 6042.66,2296.35 6137.95,2296.35 6090.3,2201.07 6042.66,2296.35 ; 6042.66,2415.46 6137.95,2415.46 6137.95,2510.75 6042.66,2510.75 6042.66,2415.46 ; 6042.66,2677.5 6090.3,2629.85 6137.95,2677.5 6090.3,2725.14 6042.66,2677.5 ; 6042.66,2868.07 6066.48,2868.07 6090.3,2844.25 6114.12,2868.07 6137.95,2868.07 6114.12,2891.89 6137.95,2915.71 6114.12,2915.71 6090.3,2939.53 6066.48,2915.71 6042.66,2915.71 6066.48,2891.89 6042.66,2868.07 ; 6042.66,3058.64 6090.3,3082.46 6137.95,3058.64 6114.12,3106.28 6137.95,3153.93 6090.3,3130.1 6042.66,3153.93 6066.48,3106.28 6042.66,3058.64 ; 6042.66,3296.85 6066.48,3296.85 6066.48,3273.03 6114.12,3273.03 6114.12,3296.85 6137.95,3296.85 6137.95,3344.5 6114.12,3344.5 6114.12,3368.32 6066.48,3368.32 6066.48,3344.5 6042.66,3344.5 6042.66,3296.85 ; 6042.66,3487.43 6042.66,3511.25 6066.48,3535.07 6042.66,3558.89 6042.66,3582.71 6066.48,3582.71 6090.3,3558.89 6114.12,3582.71 6137.95,3582.71 6137.95,3558.89 6114.12,3535.07 6137.95,3511.25 6137.95,3487.43 6114.12,3487.43 6090.3,3511.25 6066.48,3487.43 6042.66,3487.43 ; 6061.72,1791.34 6118.89,1791.34 6118.89,1848.51 6061.72,1848.51 6061.72,1791.34
  lines w15: 5958.54,1707.96 12891.5,1707.96 ; 5958.54,3637.5 12891.5,3637.5 ; 6732.16,1493.57 6732.16,3851.89 ; 7580.93,1493.57 7580.93,3851.89 ; 9201.25,1493.57 9201.25,3851.89 ; 9910.56,1493.57 9910.56,3851.89 ; 10945.63,1493.57 10945.63,3851.89 ; 11774.96,1493.57 11774.96,3851.89 ; 5958.54,1493.57 12891.5,1493.57 12891.5,3851.89 5958.54,3851.89 5958.54,1493.57
  text "Symbol" at 6087.18,3701.82 h102.91
  text "Count" at 6796.48,3701.82 h102.91
  text "Hole Size" at 7645.24,3701.82 h102.91
  text "Plated" at 9265.57,3701.82 h102.91
  text "Hole Type" at 9974.87,3701.82 h102.91
  text "Via/Pad" at 11009.95,3701.82 h102.91
  text "Pad Shape" at 11839.28,3701.82 h102.91
  text "89" at 6796.48,3487.43 h85.76
  text "6.00mil (0.152mm)" at 7645.24,3487.43 h85.76
  text "PTH" at 9265.57,3487.43 h85.76
  text "Round" at 9974.87,3487.43 h85.76
  text "Via" at 11009.95,3487.43 h85.76
  text "Rounded" at 11839.28,3487.43 h85.76
  text "2" at 6796.48,3273.03 h85.76
  text "7.87mil (0.200mm)" at 7645.24,3273.03 h85.76
  text "PTH" at 9265.57,3273.03 h85.76
  text "Round" at 9974.87,3273.03 h85.76
  text "Via" at 11009.95,3273.03 h85.76
  text "Rounded" at 11839.28,3273.03 h85.76
  text "49" at 6796.48,3058.64 h85.76
  text "10.00mil (0.254mm)" at 7645.24,3058.64 h85.76
  text "PTH" at 9265.57,3058.64 h85.76
  text "Round" at 9974.87,3058.64 h85.76
  text "Via" at 11009.95,3058.64 h85.76
  text "Rounded" at 11839.28,3058.64 h85.76
  text "140" at 6796.48,2844.25 h85.76
  text "20.00mil (0.508mm)" at 7645.24,2844.25 h85.76
  text "PTH" at 9265.57,2844.25 h85.76
  text "Round" at 9974.87,2844.25 h85.76
  text "(Mixed)" at 11009.95,2844.25 h85.76
  text "Rounded" at 11839.28,2844.25 h85.76
  text "259" at 6796.48,2629.85 h85.76
  text "28.00mil (0.711mm)" at 7645.24,2629.85 h85.76
  text "PTH" at 9265.57,2629.85 h85.76
  text "Round" at 9974.87,2629.85 h85.76
  text "Via" at 11009.95,2629.85 h85.76
  text "Rounded" at 11839.28,2629.85 h85.76
  text "82" at 6796.48,2415.46 h85.76
  text "35.43mil (0.900mm)" at 7645.24,2415.46 h85.76
  text "PTH" at 9265.57,2415.46 h85.76
  text "Round" at 9974.87,2415.46 h85.76
  text "Pad" at 11009.95,2415.46 h85.76
  text "(Mixed)" at 11839.28,2415.46 h85.76
  text "3" at 6796.48,2201.07 h85.76
  text "62.00mil (1.575mm)" at 7645.24,2201.07 h85.76
  text "PTH" at 9265.57,2201.07 h85.76
  text "Round" at 9974.87,2201.07 h85.76
  text "Pad" at 11009.95,2201.07 h85.76
  text "Rounded" at 11839.28,2201.07 h85.76
  text "96" at 6796.48,1986.67 h85.76
  text "67.00mil (1.702mm)" at 7645.24,1986.67 h85.76
  text "PTH" at 9265.57,1986.67 h85.76
  text "Round" at 9974.87,1986.67 h85.76
  text "Pad" at 11009.95,1986.67 h85.76
  text "Rounded" at 11839.28,1986.67 h85.76
  text "4" at 6796.48,1772.28 h85.76
  text "150.00mil (3.810mm)" at 7645.24,1772.28 h85.76
  text "PTH" at 9265.57,1772.28 h85.76
  text "Round" at 9974.87,1772.28 h85.76
  text "Pad" at 11009.95,1772.28 h85.76
  text "Rounded" at 11839.28,1772.28 h85.76
  text "724 Total" at 6796.48,1557.89 h85.76

## Dimensions
0,0 to 5700,0 on Drill Guide
0,0 to -50,3900 on Drill Guide

## Text inside footprints (layer, text, board x,y; h text height)
H9: Top Overlay "12" at 2620,3705 h25 r90; Top Overlay "1" at 2730,3735 h25 r90; Top Overlay "1" at 2730,3708.82 h25 r90; Top Overlay "1" at 2730,3028.82 h25 r90; Top Overlay "2" at 2630,3028.82 h25 r90
P1: Top Overlay "2" at 2235,3680 h30 r180; Top Overlay "1" at 2235,3780 h30 r180; Top Overlay "19" at 1175,3780 h30 r180; Top Overlay "20" at 1175,3680 h30 r180